# Altium PCB MdBBCar_FPV_Sensor_v1.0.PcbDoc
Units mil, origin at the board's own origin, x right, y up, seen from the top; angles counter-clockwise.
Board outline 555.11 x 552.56 mil, 2 copper layers (Top Layer, Bottom Layer); 4 components, 6 nets, 43 pads, 36 vias.
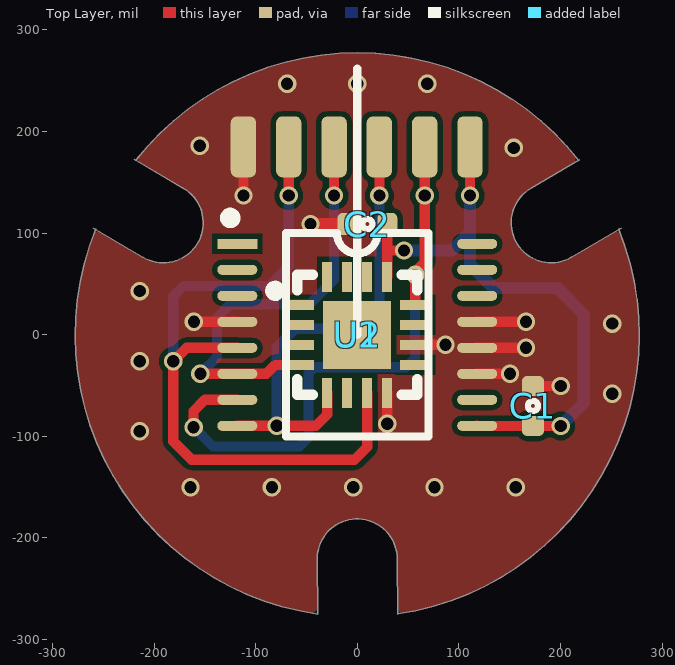
[diagram p0: Top Layer view]
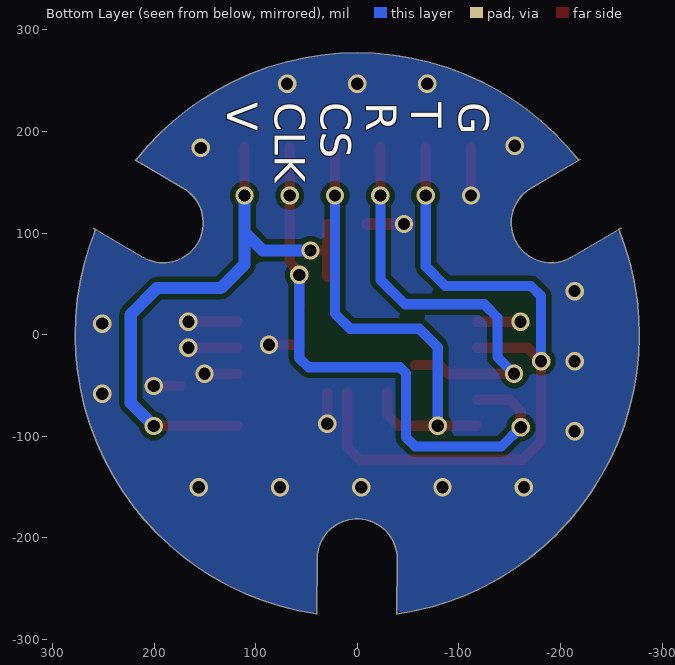
[diagram p1: Bottom Layer view, seen from below]
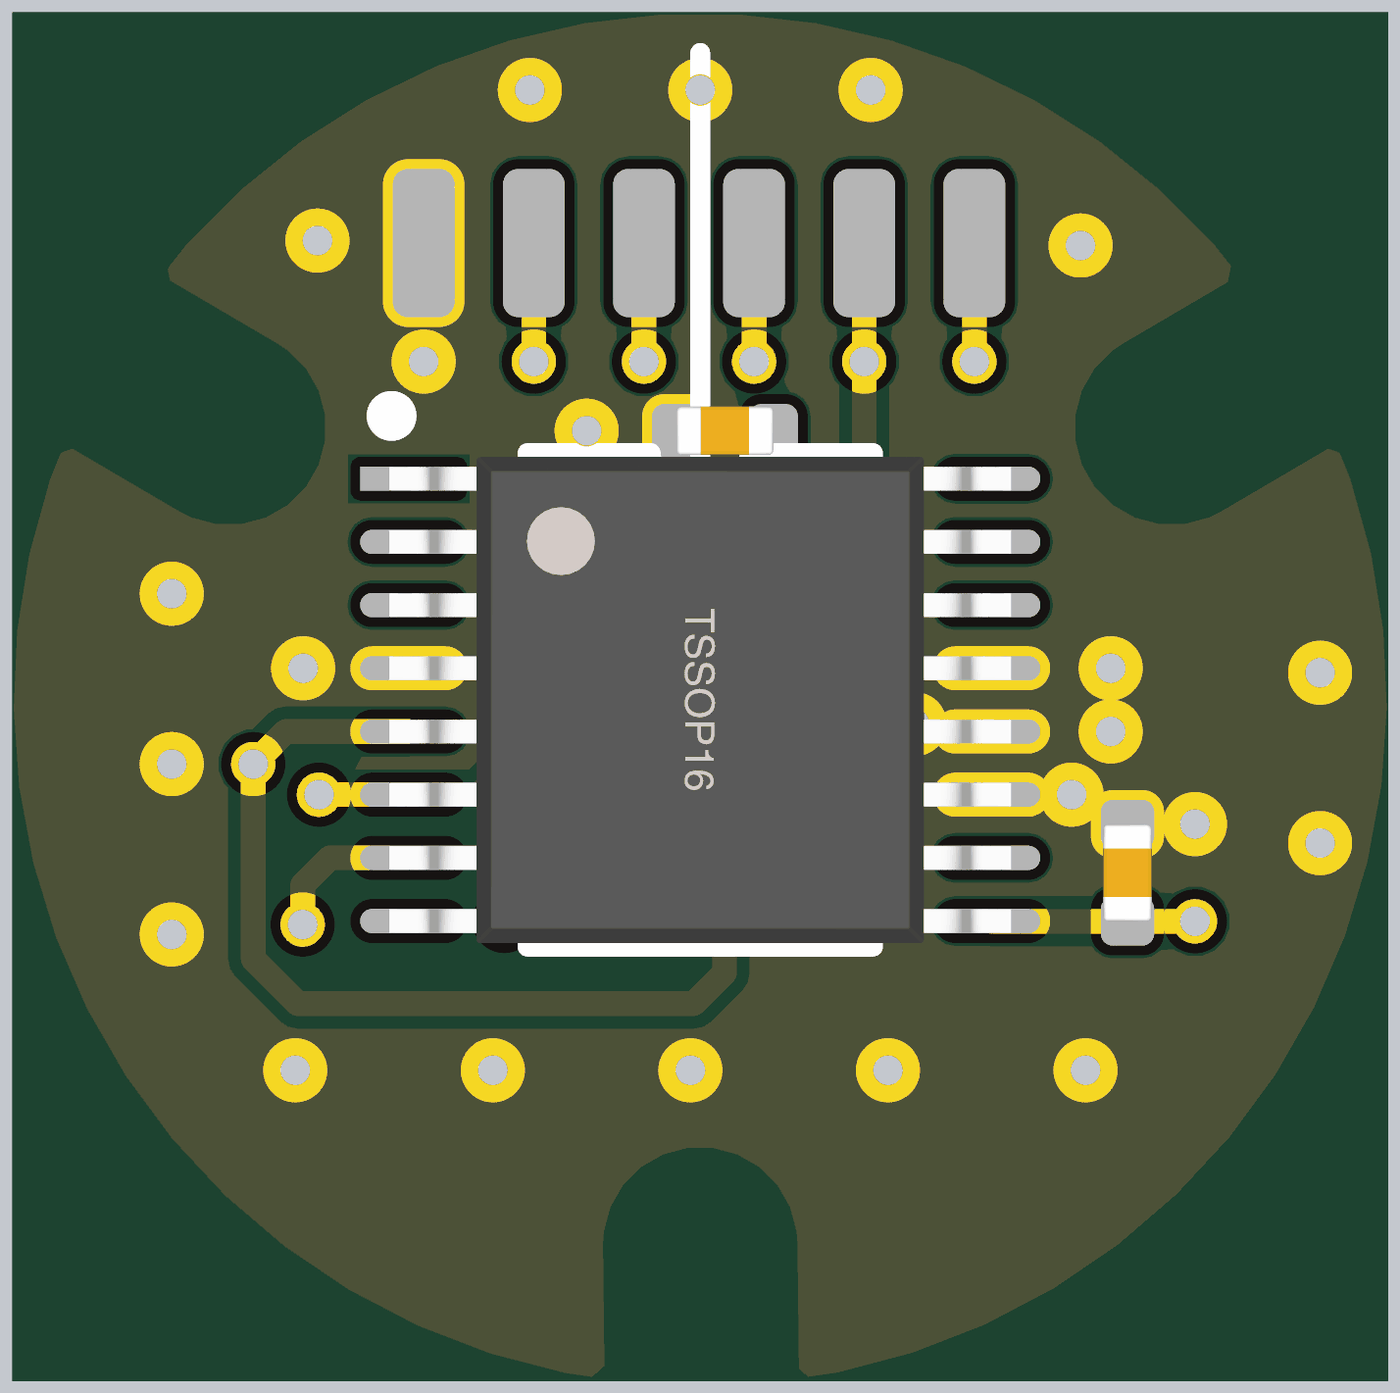
[diagram p2: 3D render of the assembled board from above, using the file's embedded part models]

## Layer stack, top to bottom
Top Solder: solder mask 0.4, Solder Resist, Dk 3.5
Top Layer: signal copper 1.4
Dielectric 1: dielectric 12.6, FR-4, Dk 4.8
Bottom Layer: signal copper 1.4
Bottom Solder: solder mask 0.4, Solder Resist, Dk 3.5

## Board outline
-210.62,76.14 ccw(c-190.93,110.24) -171.25,144.33 -219.36,172.56 -218.02,171.77 cw(c0,0) 218.09,171.69 218.72,172.18 171.25,144.33 ccw(c190.94,110.24) 210.62,76.14 259.95,105.08 257.33,104.02 cw(c0,0) 39.95,-274.67 40,-275 39.37,-220.47 ccw(c0,-220.47) -39.37,-220.47 -38.74,-275 -38.74,-274.84 cw(c0,0) -257.33,104.02 -259.95,105.08

## Design rules (kind name [scope] priority, off if disabled: settings)
Clearance [All] p1: gap=5 ignorepadtopadclearanceinfootprint=FALSE
ComponentClearance [All] p1: gap=0 collisioncheckmode=3 verticalgap=0 showdistances=FALSE
PlaneClearance [All] p1: clearance=6
PlaneConnect [All] p1: planeconnectstyle=Direct reliefexpansion=20 reliefentries=4 reliefconductorwidth=10 reliefairgap=10
PolygonConnect [All] p1: connectstyle=Direct reliefconductorwidth=10 reliefentries=4 polygonreliefangle="90 Angle" airgapwidth=10
RoutingVias [All] p1: holewidth=12 width=18 viastyle="Through Hole" minholewidth=12 minwidth=18 maxholewidth=28 maxwidth=50
SolderMaskExpansion [All] p1: expansion=4 istentingtop=FALSE
Width [All] p1: maxlimit=20 minlimit=6 preferedwidth=10
27 further rules are at their usual default settings.

## Components (designator, comment, footprint, x,y, rotation, side; value= is the part's Value field where it differs from the comment)
C1 "100nF" "C 0402_L" 173,-70 r270 top
C2 "100nF" "C 0402_L" 10,109 r0 top
U1 "MT6835" TSSOP16_L 0,0 r0 top
U2 "MA732" "QFN16 3X3" 0,0 r270 top

## Footprints (in the part's own frame and the unit in brackets; to place one, negate y for a bottom-side part, rotate by r counter-clockwise, add the part's x,y. Pads: shape width x height; smd on the part's side, far side on the other; paste and mask are expansions set on the pad)
"C 0402_L" [mm] "无极性贴片电容"
  rrect50% 0.5x0.55 smd: 1(-0.5,0) 2(0.5,0)
  silkscreen extent -0.13,-0.13 0.13,0.13, body extent -0.5,-0.25 0.5,0.25, height 0.5
"QFN16 3X3" [mm]
  rect 0.25x0.75 smd paste-100 mask+0.051: 1(-0.748,-1.45) 2(-0.249,-1.45) 3(0.252,-1.45) 4(0.751,-1.45) 9(0.75,1.45) 10(0.25,1.45) 11(-0.25,1.45) 12(-0.749,1.45)
  rect 0.75x0.25 smd paste-100 mask+0.051: 5(1.45,-0.75) 6(1.45,-0.25) 7(1.45,0.25) 8(1.45,0.75) 13(-1.45,0.75) 14(-1.45,0.25) 15(-1.45,-0.25) 16(-1.45,-0.75)
  rect 1.7x1.7 smd paste-100 mask+0.051: 17(0,0)
  silkscreen extent -1.5,-2.17 1.5,1.5, body extent -1.52,-1.52 1.52,1.52, height 0.9
TSSOP16_L [mm] "5*6.4*1mm（长宽高）"
  rect 1x0.25 smd: 1(-2.998,2.275)
  oval 1x0.25 smd: 2(-2.998,1.625) 3(-2.998,0.975) 4(-2.998,0.325) 5(-2.998,-0.325) 6(-2.998,-0.975) 7(-2.998,-1.625) 8(-2.998,-2.275) 9(2.998,-2.275) 10(2.998,-1.625) 11(2.998,-0.975) 12(2.998,-0.325) 13(2.998,0.325) 14(2.998,0.975) 15(2.998,1.625) 16(2.998,2.275)
  silkscreen extent -3.3,-2.54 1.78,3.05, body extent -3.2,-2.5 3.2,2.5, height 1.03

## Part data
C1 C2: library part C, "无极性贴片电容", BOM名称=无极性贴片电容, 学习资源=www.ooocke.com, 版权归属=源创客
U1: "21bit磁编码芯片"
U2: "14bit编码器芯片"

## Free pads (board coordinates)
  rrect50% 25x60 smd: 5(-112,185) 5(-67.4,185) 5(-22.8,185) 5(21.8,185) 5(66.4,185) 5(111,185)

## Via types
v1: diameter 18, hole 12, Top Layer to Bottom Layer, 36 vias

## Nets (pads, with @x,y where several pads share a name; then routed paths per layer and width w, separated by ;. In a path a pad name is that pad's centre, name@x,y a point inside that pad or via, vN(x,y) a via of type N, cw(c..) or ccw(c..) an arc to the next point about the centre after c; other vN are vias at no path point)
CLK: pad.5@66.4,185 U1.7 U2.12 | length 600.6
  Top Layer w10: v1(-161,-91) -161,-75 -149.98,-63.98 U1.7 ; U2.12 v1@57.09,59 ; v1@57.09,62.09 66.4,71.4 v1(66.4,137) pad.5@66.4,185
  Bottom Layer w10: v1(-161,-91) -142,-110 -57,-110 -48,-101 -48,-38 -42,-32 48,-32 57,-23 v1(57,59)
CS: pad.5@21.8,185 U1.8 U2.5 | length 470.8
  Top Layer w10: U1.8 v1(-79.3,-89.57) -40.57,-89.57 -29.52,-78.52 U2.5 ; v1(21.8,137) pad.5@21.8,185
  Bottom Layer w10: v1(-79.3,-89.57) -79.3,-12.3 -61,6 7,6 21.8,20.8 v1(21.8,137)
GND: C1.1 C2.1 pad.5@-112,185 U1.4 U1.11 U1.12 U1.13 U2.8 U2.10 | length 343.2
  Top Layer w10: v1(-160.8,12.8) U1.4 ; v1(-112,137) pad.5@-112,185 ; v1(29.53,-87.47) U2.8 ; U2.10 v1(86.85,-9.85) ; U1.11 v1(150.39,-38.39) ; U1.12 v1(166.2,-12.8) ; U1.13 v1(166.2,12.8) ; C1.1 v1(200.32,-50.32)
  Top Layer w12: v1(-46,109) C2.1
  other v1: -164,-150 -84,-150 -4,-150 76,-150 156,-150 -214,-95 251,-58 -214,-26 251,11 -214,43 154,184 -155,186 -69,247 0,247 69,247
MISO: pad.5@-67.4,185 U1.5 U2.7 | length 711.7
  Top Layer w10: U1.5 -167.8,-12.8 v1(-181,-26) -181,-104.91 -162.91,-123 -2.68,-123 9.85,-110.47 U2.7 ; v1(-67.4,137) pad.5@-67.4,185
  Bottom Layer w10: v1(-181,-26) -181,38 -171,48 -86.7,48 -67.4,67.3 v1(-67.4,137)
MOSI: pad.5@-22.8,185 U1.6 U2.4 | length 424.5
  Top Layer w10: v1(-154.39,-38.39) U1.6 -89.39,-38.39 -80.59,-29.59 U2.4 ; v1(-22.8,137) pad.5@-22.8,185
  Bottom Layer w10: v1(-154.39,-38.39) -138,-22 -138,17 -125,30 -47,30 -22.8,54.2 v1(-22.8,137)
VDD: C1.2 C2.2 pad.5@111,185 U1.9 U2.13 | length 590.5
  Top Layer w10: U2.13 29.53,82.97 ; C2.2 29.53,108.84 29.53,82.97 ; v1(45.97,82.97) 29.53,82.97 ; v1(111,137) pad.5@111,185 ; U1.9 118.15,-89.68 C1.2 v1(200.32,-89.68)
  Bottom Layer w12: v1(45.97,82.97) 92.97,82.97 111,101 ; v1(111,137) 111,101 ; v1(200.32,-89.68) 223,-67 223,20 197,46 134.16,46 111,69.16 111,101
pads on no net: U1.1 U1.2 U1.3 U1.10 U1.14 U1.15 U1.16 U2.1 U2.2 U2.3 U2.6 U2.9 U2.11 U2.14 U2.15 U2.16 U2.17

## Polygon pours and split planes (outlines as drawn)
GND on Top Layer "GND_L01_P000" (solid, remove dead copper, pour order 0): -210.62,76.14 ccw(c-190.93,110.24) -171.25,144.33 -219.36,172.56 -218.02,171.77 cw(c0,0) 218.09,171.69 218.72,172.18 171.25,144.33 ccw(c190.94,110.24) 210.62,76.14 259.95,105.08 257.33,104.02 cw(c0,0) 39.95,-274.67 40,-275 39.37,-220.47 ccw(c0,-220.47) -39.37,-220.47 -38.74,-275 -38.74,-274.84 cw(c0,0) -257.33,104.02 -259.95,105.08
GND on Bottom Layer "GND_L02_P001" (solid, remove dead copper, pour order 1): -210.62,76.14 ccw(c-190.93,110.24) -171.25,144.33 -219.36,172.56 -218.02,171.77 cw(c0,0) 218.09,171.69 218.72,172.18 171.25,144.33 ccw(c190.94,110.24) 210.62,76.14 259.95,105.08 257.33,104.02 cw(c0,0) 39.95,-274.67 40,-275 39.37,-220.47 ccw(c0,-220.47) -39.37,-220.47 -38.74,-275 -38.74,-274.84 cw(c0,0) -257.33,104.02 -259.95,105.08

## Silkscreen, mask and mechanical layers (free items; w line width, h text height)
Top Overlay:
  lines w8: 0,0 0,262
Bottom Overlay:
  text "G" at -100,229 h30 r90
  text "T" at -53,229 h30 r90
  text "R" at -9,229 h30 r90
  text "CS" at 36,229 h30 r90
  text "CLK" at 81,229 h30 r90
  text "V" at 128,229 h30 r90
Mechanical 1:
  lines w8: -259.95,105.08 -210.62,76.14 ccw(c-190.93,110.24) -171.25,144.33 -219.36,172.56 ; -257.33,104.02 ccw(c0,0) -38.74,-274.84 ; -218.02,171.77 cw(c0,0) 218.09,171.69 ; -38.74,-275 -39.37,-220.47 cw(c0,-220.47) 39.37,-220.47 40,-275 ; 39.95,-274.67 ccw(c0,0) 257.33,104.02 ; 218.72,172.18 171.25,144.33 ccw(c190.93,110.24) 210.62,76.14 259.95,105.08